# Altium PCB Player.PcbDoc (part 6 of 6)
Units mil, origin at the board's own origin, x right, y up, seen from the top; angles counter-clockwise.
Board outline 2992.13 x 3937.01 mil, 6 copper layers (Top Layer, Mid-Layer 1, Mid-Layer 2, Mid-Layer 3, Mid-Layer 4, Bottom Layer), stack 60.567 mil thick; 284 components, 323 nets, 1590 pads, 1045 vias.
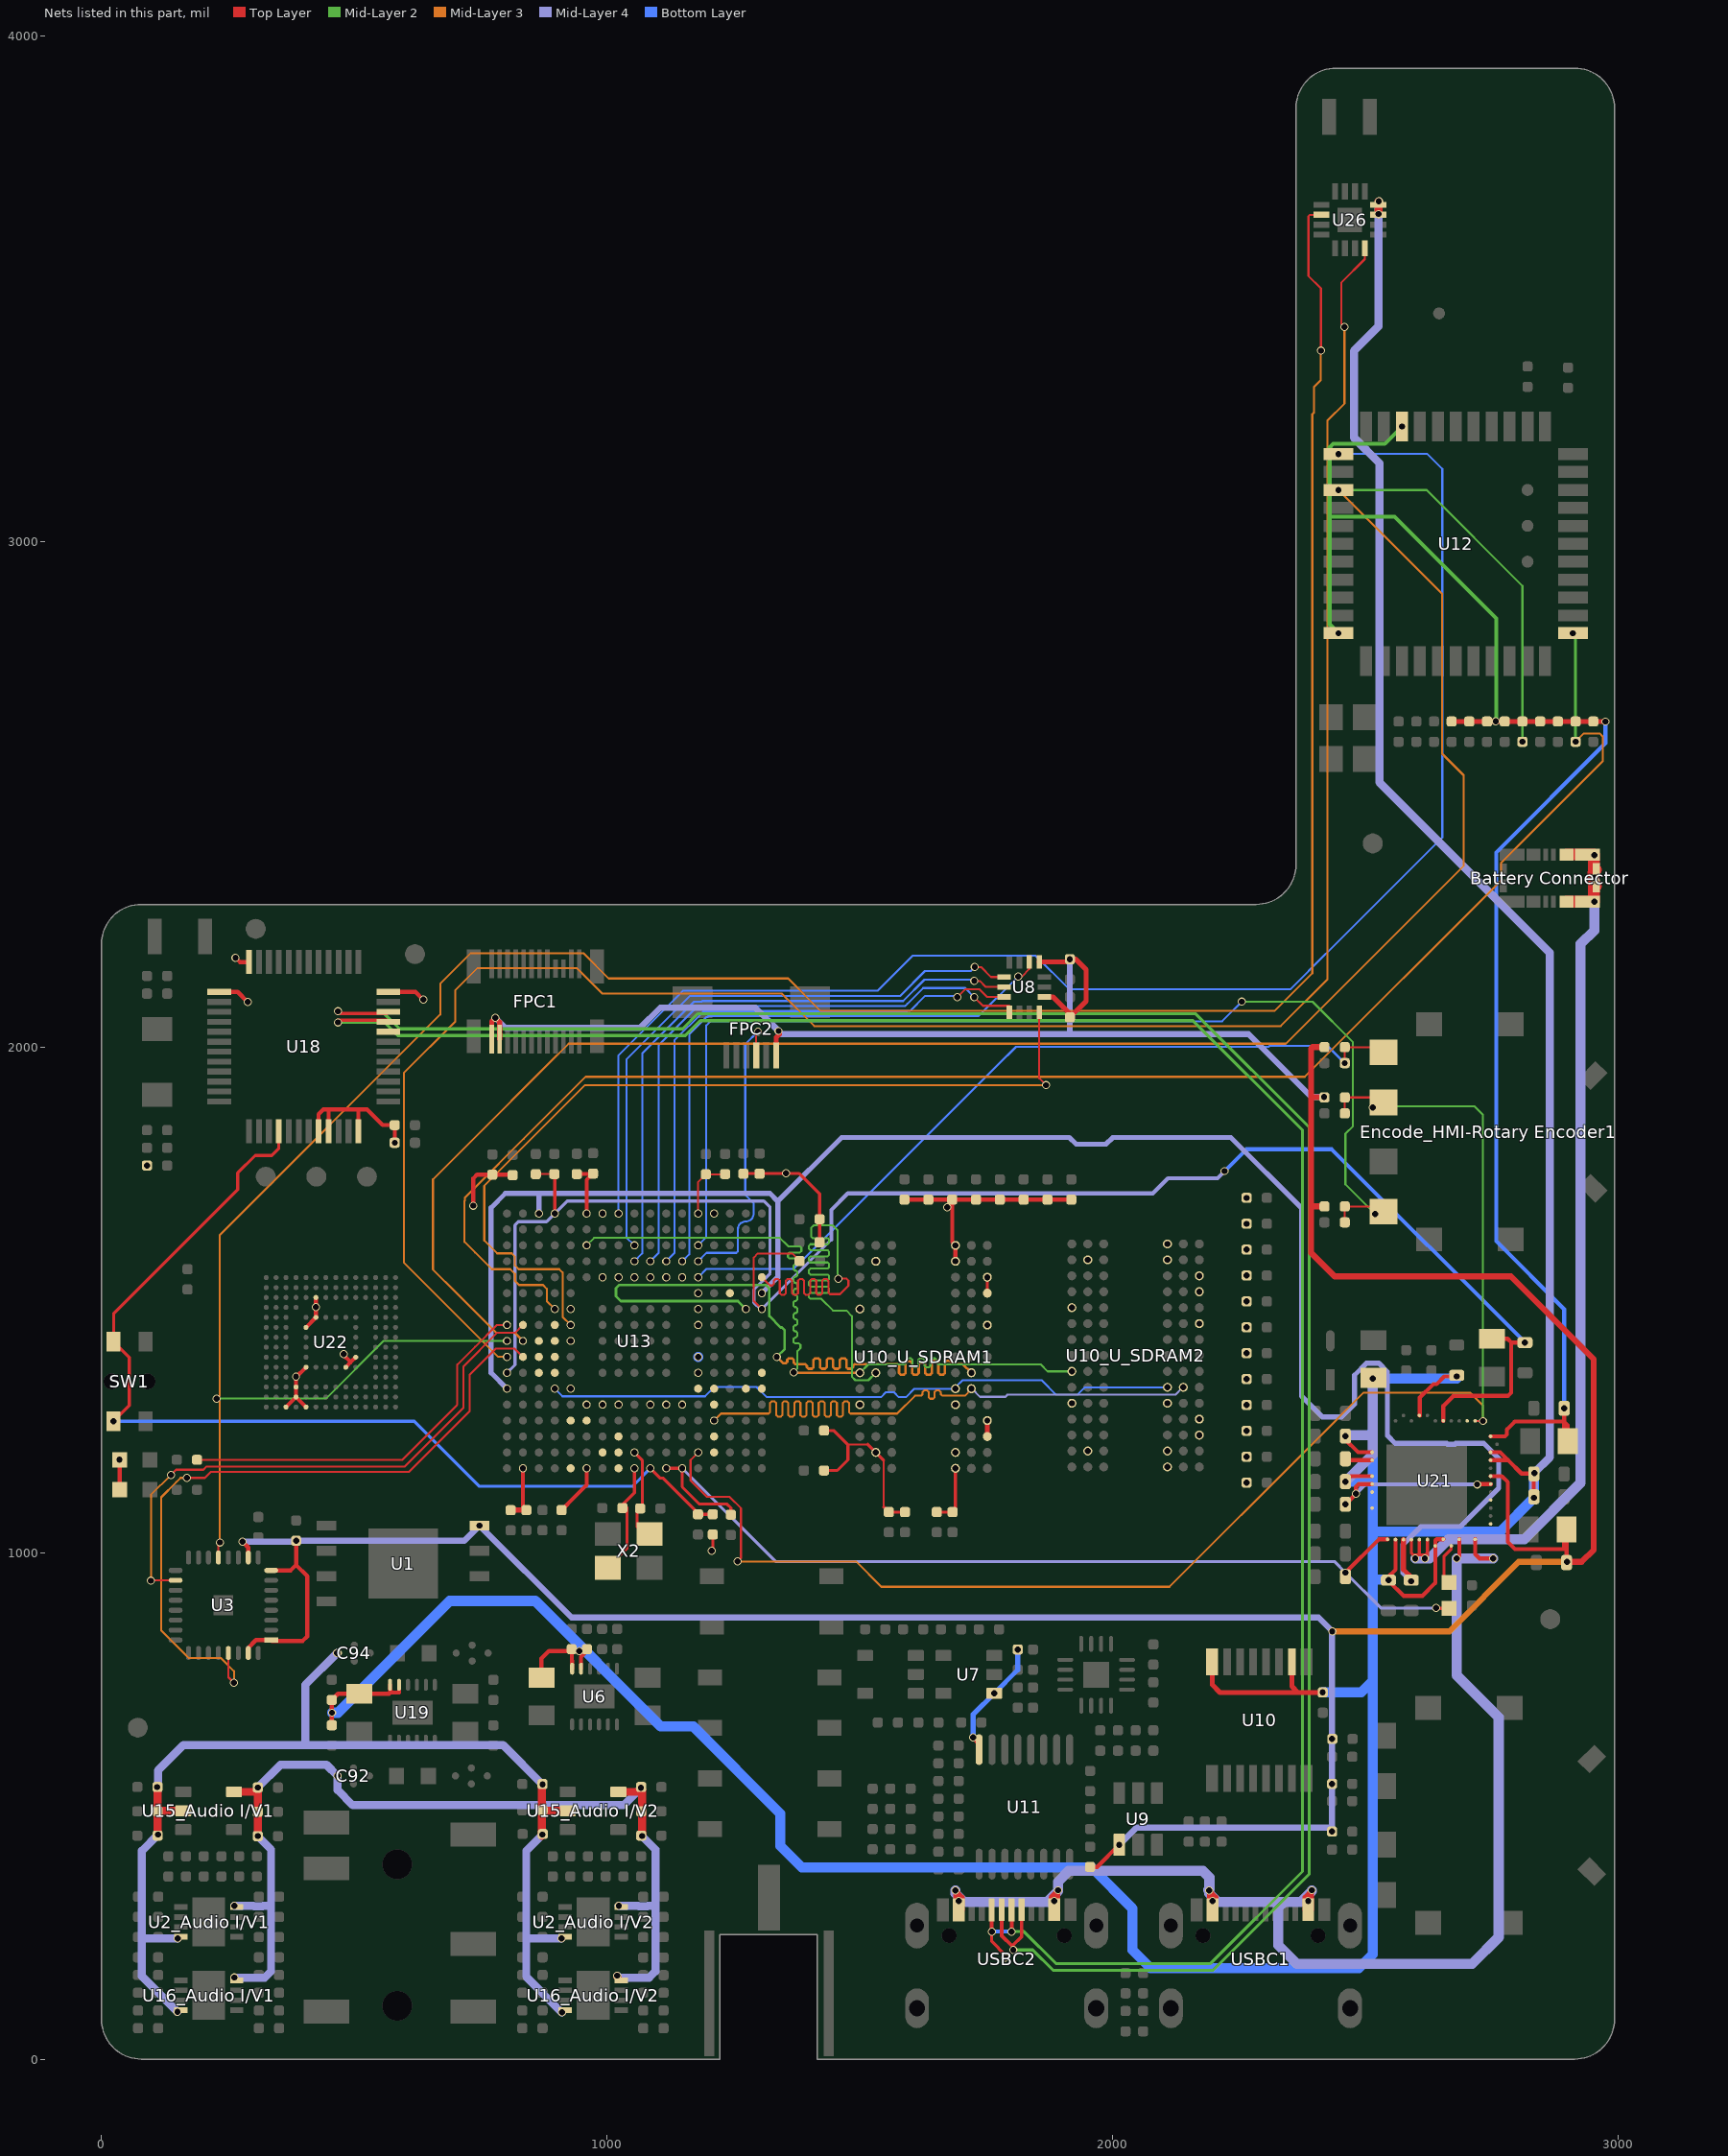
[diagram p10: the nets of this part, all layers, seen from the top]

## Via types
v1: diameter 16, hole 12, Top Layer to Bottom Layer, tented both sides, 1045 vias

## Nets (pads, with @x,y where several pads share a name; then routed paths per layer and width w, separated by ;. In a path a pad name is that pad's centre, name@x,y a point inside that pad or via, vN(x,y) a via of type N, cw(c..) or ccw(c..) an arc to the next point about the centre after c; other vN are vias at no path point) (continued)
PG8: U10_U_SDRAM1.J1 U10_U_SDRAM2.J1 U13.F15 | length 1433.7
  Mid-Layer 2 w4: v1(959.45,1609.13) 974.21,1623.9 1341.73,1623.9 1356.53,1609.09 1358.53,1607.09 1381.04,1607.09 1384.04,1604.09 1384.04,1598.09 1381.04,1595.09 1360.6,1595.09 1357.6,1592.09 1357.6,1586.09 1360.6,1583.09 1373.28,1583.09 1376.28,1580.09 1376.28,1574.09 1373.28,1571.09 1371.21,1571.09 1368.21,1568.09 1368.21,1562.09 1371.21,1559.09 1373.28,1559.09 1376.28,1556.09 1376.28,1550.09 1373.28,1547.09 1371.21,1547.09 1368.21,1544.09 1368.21,1538.09 1371.21,1535.09 1373.28,1535.09 1376.28,1532.09 1376.28,1526.09 1373.28,1523.09 1371.21,1523.09 1368.21,1520.09 1368.21,1514.09 1371.21,1511.09 1373.28,1511.09 1376.28,1508.09 1376.28,1502.09 1373.28,1499.09 1371.21,1499.09 1368.21,1496.09 1368.21,1490.09 1371.21,1487.09 1373.28,1487.09 1376.28,1484.09 1376.28,1478.09 1373.28,1475.09 1371.21,1475.09 1368.21,1472.09 1368.21,1466.09 1371.21,1463.09 1373.28,1463.09 1376.28,1460.09 1376.28,1454.09 1373.28,1451.09 1371.21,1451.09 1368.21,1448.09 1368.21,1442.09 1371.21,1439.09 1373.28,1439.09 1376.28,1436.09 1376.28,1430.09 1373.28,1427.09 1371.56,1427.09 1368.56,1424.09 1368.56,1418.09 1371.56,1415.09 1379.28,1415.09 1382.28,1412.09 1382.28,1406.09 1379.28,1403.09 1376.28,1400.09 1376.28,1371.52 1376.28,1365.53 v1(1368.9,1358.15) ; v1(1499.8,1357.16) 1516.48,1373.84 1586.42,1373.84 1588.42,1373.84 1591.42,1376.84 1591.42,1382.84 1594.42,1385.84 1600.42,1385.84 1603.42,1382.84 1603.42,1371.18 1606.42,1368.18 1612.42,1368.18 1615.42,1371.18 1615.42,1382.84 1618.42,1385.84 1624.42,1385.84 1627.42,1382.84 1627.42,1371.18 1630.42,1368.18 1636.42,1368.18 1639.42,1371.18 1639.42,1382.57 1642.42,1385.57 1648.42,1385.57 1651.42,1382.57 1651.42,1376.84 1654.42,1373.84 1676.97,1373.84 1857.27,1373.84 1871.12,1359.99 v1(1918.98,1359.99)
  Mid-Layer 3 w4: v1(1368.9,1358.15) 1369.89,1357.16 v1(1499.8,1357.16)
PG9: R10.1 U13.A10 | length 769.8
  Top Layer w4: R10.1@189,1185 594.52,1185 702.72,1293.19 703.73,1294.21 703.73,1373.32 738.71,1408.3 782.06,1451.65 v1(801.97,1451.65)
PG10: U3.13 U13.A9 U26.14 | length 5311.2
  Top Layer w4: U3.13@231.24,992.01 231.24,1018.76 v1(234.12,1021.64) ; v1(2411.33,3378.33) 2411.53,3378.53 2411.53,3501.47 2386.92,3526.08 2386.92,3643.92 2390.01,3647.01 U26.14@2412.8,3647.01
  Mid-Layer 2 w4: v1(228,1306) 444,1306 558.16,1420.16 v1(801.97,1420.16)
  Mid-Layer 3 w4: v1(234.12,1021.64) 234.12,1299.88 v1(228,1306) 234.12,1312.12 234.12,1629.91 670,2065.78 670,2126.43 730.57,2187 952.99,2187 1002.99,2137 1357.99,2137 1422.26,2072.72 2319.74,2072.72 2394.38,2147.37 2394.38,3252.47 2397.77,3255.86 2397.77,3306.77 2411.33,3320.33 v1(2411.33,3378.33)
PG11: R22.2 U12.14 U13.B9 | length 4305.9
  Mid-Layer 2 w4: v1(2446.13,3102.58) 2620.64,3102.58 2810,2913.21 v1(2810,2605)
  Mid-Layer 3 w4: v1(833.46,1420.16) 817.41,1436.21 780.68,1436.21 738.71,1478.18 702.72,1514.18 655.54,1561.35 655.54,1705.83 655.54,1739.48 738.71,1822.65 881.89,1965.83 923.89,2007.83 2341.97,2007.83 2694,2359.86 2694,2368.14 2694,2533.02 2693.75,2533.28 2693.75,2538.6 2651,2581.35 2651,2897.71 v1(2446.13,3102.58)
PG12: U13.C9
PG13: U13.D9
PG14: U13.D8
PG15: U10_U_SDRAM1.K7 U10_U_SDRAM2.K7 U13.D6 | length 1275.2
  Bottom Layer w4: v1(896.46,1325.67) 911.45,1310.67 1193.77,1310.67 1212.09,1329 1295.52,1329 1315.59,1308.94 1541.71,1308.94 1551.6,1318.83 1566.82,1318.83 1576.71,1308.94 1590.79,1308.94 1607.53,1325.67 v1(1688.77,1325.67) 1688.77,1328.43 1702.67,1342.32 1859.13,1342.32 1887.68,1313.78 1929.84,1313.78 1944.56,1328.5 v1(2107.95,1328.5)
PGA_OUT1: R50.2 U7.1 U11.8 | length 239.1
  Top Layer w10: v1(1724,636) 1735.43,624.57 U11.8@1735.43,612.09
  Bottom Layer w10: v1(1724,636) 1724,681.8 v1(1765.39,723.19) 1812.01,769.8 v1(1812.01,810)
PH0: C57.1 U13.J2 X2.3 | length 188
  Top Layer w6: v1(1053.94,1199.68) 1069.53,1184.09 1069.53,1093.06 C57.1@1065.29,1088.83 1058.93,1082.47 1058.93,1053.63 1074.27,1038.29 X2.3@1083.63,1038.29
PH1: C54.1 U13.J1 X2.1 | length 243.3
  Top Layer w6: X2.1@1000.95,971.36 1039.29,1009.7 1039.29,1080.83 ; C54.1@1034.28,1095.83 1039.29,1090.82 1039.29,1080.83 ; v1(1053.94,1168.19) 1053.94,1119.67 1030.29,1096.02 C54.1@1030.29,1089.83 1039.29,1080.83
PH2: "C3_HMI-Rotary Encoder1.1" "Encode_HMI-Rotary Encoder1.S" "R15_HMI-Rotary Encoder1.1" U13.N2 U21.25 | length 2945.7
  Top Layer w4: v1(1179.92,1199.68) 1165,1184.76 1165,1144 1197,1112 1242.07,1112 1264.66,1089.41 1264.66,990.66 v1(1258,984) ; 2458.58,1870.08 2458.58,1901.57 2524.97,1901.57 2535.11,1891.43 ; U21.25@2716.5,1262.01 2731.64,1262.01 v1(2731.83,1261.81)
  Mid-Layer 2 w4: v1(2514,1882) 2516,1884 2715,1884 2731.83,1867.17 v1(2731.83,1261.81)
  Mid-Layer 3 w4: v1(1258,984) 1492,984 1542,934 2112,934 2393,1215 2496,1318 2706.22,1318 2731.83,1292.38 v1(2731.83,1261.81)
PH3: U13.P2
PH4: U13.P3
PH5: U10_U_SDRAM1.K8 U10_U_SDRAM2.K8 U13.P4 | length 1365.5
  Mid-Layer 3 w4: v1(1211.42,1262.68) 1225.2,1276.46 1317.32,1276.46 1319.32,1276.46 1322.32,1279.46 1322.32,1297.32 1325.32,1300.32 1331.32,1300.32 1334.32,1297.32 1334.32,1273.46 1337.32,1270.46 1343.32,1270.46 1346.32,1273.46 1346.32,1297.32 1349.32,1300.32 1355.32,1300.32 1358.32,1297.32 1358.32,1273.46 1361.32,1270.46 1367.32,1270.46 1370.32,1273.46 1370.32,1297.32 1373.32,1300.32 1379.32,1300.32 1382.32,1297.32 1382.32,1273.46 1385.32,1270.46 1391.32,1270.46 1394.32,1273.46 1394.32,1297.32 1397.32,1300.32 1403.32,1300.32 1406.32,1297.32 1406.32,1273.46 1409.32,1270.46 1415.32,1270.46 1418.32,1273.46 1418.32,1297.32 1421.32,1300.32 1427.32,1300.32 1430.32,1297.32 1430.32,1273.46 1433.32,1270.46 1439.32,1270.46 1442.32,1273.46 1442.32,1297.32 1445.32,1300.32 1451.32,1300.32 1454.32,1297.32 1454.32,1273.46 1457.32,1270.46 1463.32,1270.46 1466.32,1273.46 1466.32,1297.32 1469.32,1300.32 1475.32,1300.32 1478.32,1297.32 1478.32,1279.46 1481.32,1276.46 1487.8,1276.46 1573.34,1276.46 1608.77,1311.89 1618.71,1311.89 1620.71,1311.89 1623.71,1314.89 1623.71,1319.35 1626.71,1322.35 1632.71,1322.35 1635.71,1319.35 1635.71,1308.89 1638.71,1305.89 1644.71,1305.89 1647.71,1308.89 1647.71,1319.35 1650.71,1322.35 1656.71,1322.35 1659.71,1319.35 1659.71,1314.89 1662.71,1311.89 1705.26,1311.89 1707.48,1311.89 1720.27,1324.68 v1(1720.27,1325.67)
  Mid-Layer 4 w4: v1(1720.27,1325.67) 1721.26,1325.67 1737.29,1309.64 1787.9,1309.64 1791.14,1312.87 ; 1791.14,1313.78 2123.75,1313.78 2138.46,1328.5 v1(2139.45,1328.5)
PH6: U10_U_SDRAM1.J8 U13.T11 | length 1446.3
  Mid-Layer 2 w5: v1(1274.41,1483.15) 1258.66,1498.9 1027.36,1498.9 1017.52,1508.74 1017.52,1524.49 1024.03,1531 1313.23,1531 1320.71,1523.51 1320.71,1469.33 1343.31,1446.73 1345.28,1446.73 1351.18,1440.83 1351.18,1404.41 v1(1335.43,1388.66)
  Mid-Layer 3 w5: v1(1335.43,1388.66) 1345.73,1378.37 1348.23,1375.86 1352.83,1375.86 1356.08,1379.11 1356.08,1382.65 1359.33,1385.9 1365.83,1385.9 1369.08,1382.65 1369.08,1377.15 1372.33,1373.9 1391.83,1373.9 1395.08,1370.65 1395.08,1368.41 1398.33,1365.16 1404.83,1365.16 1408.08,1368.41 1408.08,1382.65 1411.33,1385.9 1417.83,1385.9 1421.08,1382.65 1421.08,1368.41 1424.33,1365.16 1430.83,1365.16 1434.08,1368.41 1434.08,1382.65 1437.33,1385.9 1443.83,1385.9 1447.08,1382.65 1447.08,1368.41 1450.33,1365.16 1456.83,1365.16 1460.08,1368.41 1460.08,1382.65 1463.33,1385.9 1469.83,1385.9 1473.08,1382.65 1473.08,1368.41 1476.33,1365.16 1482.83,1365.16 1486.08,1368.41 1486.08,1370.65 1489.33,1373.9 1573.83,1373.9 1577.08,1370.65 1577.08,1356.61 1580.33,1353.36 1586.83,1353.36 1590.08,1356.61 1590.08,1376.38 1593.33,1379.63 1599.83,1379.63 1603.08,1376.38 1603.08,1356.61 1606.33,1353.36 1612.83,1353.36 1616.08,1356.61 1616.08,1373.58 1619.33,1376.83 1625.83,1376.83 1629.08,1373.58 1629.08,1356.61 1632.33,1353.36 1638.83,1353.36 1642.08,1356.61 1642.08,1378.23 1645.33,1381.48 1651.83,1381.48 1655.08,1378.23 1655.08,1356.61 1658.33,1353.36 1664.83,1353.36 1668.08,1356.61 1668.08,1377.41 1671.33,1380.66 1677.83,1380.66 1681.08,1377.41 1681.08,1377.15 1684.33,1373.9 1690.25,1373.9 1703.53,1373.9 v1(1720.27,1357.16)
PH7: U10_U_SDRAM1.J2 U13.U13 | length 1394.9
  Top Layer w4: U13.U13@1305.91,1546.14 1320.22,1531.83 1322.22,1529.82 1326.46,1529.82 1329.46,1532.82 1329.46,1539.23 1332.46,1542.23 1338.46,1542.23 1341.46,1539.23 1341.46,1514.51 1344.46,1511.51 1350.46,1511.51 1353.46,1514.51 1353.46,1539.23 1356.46,1542.23 1362.46,1542.23 1365.46,1539.23 1365.46,1514.51 1368.46,1511.51 1374.46,1511.51 1377.46,1514.51 1377.46,1539.23 1380.46,1542.23 1386.46,1542.23 1389.46,1539.23 1389.46,1514.51 1392.46,1511.51 1398.46,1511.51 1401.46,1514.51 1401.46,1539.23 1404.46,1542.23 1410.46,1542.23 1413.46,1539.23 1413.46,1514.51 1416.46,1511.51 1422.46,1511.51 1425.46,1514.51 1425.46,1539.23 1428.46,1542.23 1434.46,1542.23 1437.46,1539.23 1437.46,1515.68 1440.46,1512.68 1450.59,1512.68 1460.43,1512.68 1477.17,1529.41 1477.17,1539.25 1473.23,1543.19 v1@1460.43,1543.19
  Mid-Layer 2 w4: v1(1457.48,1543.19) 1456.5,1543.19 1455.51,1544.17 1455.51,1639.38 1446.39,1648.5 1408.27,1648.5 1403.35,1643.58 1403.35,1634.83 1403.35,1626.38 1406.35,1623.38 1435.96,1623.38 1438.96,1620.38 1438.96,1614.38 1435.96,1611.38 1402.04,1611.38 1399.04,1608.38 1399.04,1602.38 1402.04,1599.38 1435.96,1599.38 1438.96,1596.38 1438.96,1590.38 1435.96,1587.38 1402.04,1587.38 1399.04,1584.38 1399.04,1578.38 1402.04,1575.38 1435.96,1575.38 1438.96,1572.38 1438.96,1566.38 1435.96,1563.38 1402.04,1563.38 1399.04,1560.38 1399.04,1554.38 1402.04,1551.38 1435.96,1551.38 1438.96,1548.38 1438.96,1542.38 1435.96,1539.38 1402.04,1539.38 1399.04,1536.38 1399.04,1530.38 1402.04,1527.38 1435.96,1527.38 1438.96,1524.38 1438.96,1518.38 1435.96,1515.38 1402.04,1515.38 1399.04,1512.38 1399.04,1506.38 1402.04,1503.38 1423.47,1503.38 1425.48,1501.38 1446.65,1480.2 1473.23,1480.2 1484.06,1469.37 1484.06,1349.29 1490.95,1342.4 1516.54,1342.4 v1(1531.29,1357.16)
PI8: U13.E4
PI11: U13.F4
PI12: U13.H1
PI13: U13.H2
PI14: U13.H3
PI15: U13.P5
PJ0: U13.N6
PJ1: U13.P6
PJ2: U13.T6
PJ3: U13.U6
PJ4: U13.U7
PJ5: U13.R12
PJ6: "C2_HMI-Rotary Encoder1.1" "Encode_HMI-Rotary Encoder1.B" "R13_HMI-Rotary Encoder1.1" U13.N15 | length 2256
  Top Layer w4: 2458.58,1654.53 2458.58,1686.02 2524.97,1686.02 2535.11,1675.88
  Mid-Layer 2 w4: v1(2255,2091) 2395,2091 2475,2011 2475,1845 2460,1830 2460,1730 v1(2519,1671)
  Bottom Layer w4: v1(1179.92,1609.13) 1196.06,1625.27 1196.06,2044.01 1204.43,2052.38 1601.8,2052.38 2216.38,2052.38 v1(2255,2091)
PJ7: FPC2.3 U13.N14 | length 605.8
  Top Layer w4: FPC2.3@1294.76,1984.27 1294.76,2028.53 v1(1298.23,2032)
  Bottom Layer w4: v1(1179.92,1577.64) 1196.59,1594.31 1255.31,1594.31 1258.66,1597.66 1258.66,1640.97 cw(c1274.16,1640.97) 1274.16,1656.46 ; 1274.16,1656.38 ccw(c1274.16,1672.13) 1289.91,1672.13 1289.91,1692.09 1273.15,1708.85 1273.15,2006.92 v1(1298.23,2032)
PJ8: "C1_HMI-Rotary Encoder1.1" "Encode_HMI-Rotary Encoder1.A" "R12_HMI-Rotary Encoder1.1" U13.N13 | length 1594.6
  Top Layer w4: v1(2458.58,1969.49) 2458.58,2000.98 2524.97,2000.98 2535.11,1990.84
  Bottom Layer w4: v1(1179.92,1546.14) 1196.4,1562.62 1368.4,1562.62 1375.92,1570.14 1376.83,1570.14 1772.52,1965.83 1808.54,2001.84 2299.52,2001.84 2308.45,2001.84 2310.3,2003.69 2424.38,2003.69 v1(2458.58,1969.49)
PJ9: U8.9 U13.M14 | length 1194.6
  Top Layer w4: v1(1813,2141) 1820.25,2141 1834.84,2155.59 U8.9@1834.84,2169.68
  Bottom Layer w4: v1(1148.43,1577.64) 1162.3,1591.51 1162.3,2026.3 1196.79,2060.79 1198.7,2060.79 1200.29,2062.38 1597.66,2062.38 1597.86,2062.58 1603.08,2062.58 1734.59,2062.59 v1(1813,2141)
PJ10: U8.14 U13.L14 | length 1146.1
  Top Layer w4: v1(1692.27,2099.93) 1708.26,2115.91 1735.7,2115.91 1751.3,2100.31 U8.14@1785.14,2100.31
  Bottom Layer w4: v1(1116.93,1577.64) 1133,1593.71 1133,2014.22 1189.57,2070.79 1194.56,2070.79 1196.15,2072.38 1593.51,2072.38 1593.71,2072.58 1598.93,2072.58 1628.86,2102.5 1689.69,2102.5 v1(1692.27,2099.93)
PJ11: U8.1 U13.K14 | length 1201.6
  Top Layer w4: v1(1725.99,2100.05) 1743.22,2082.82 1795.47,2082.82 U8.1@1795.47,2070.31
  Bottom Layer w4: v1(1085.43,1577.64) 1102,1594.2 1102,1965.83 1102,2005 1177.79,2080.79 1190.42,2080.79 1192,2082.38 1589.37,2082.38 1593.64,2086.65 1624.98,2117.99 1708.06,2117.99 v1(1725.99,2100.05)
PJ12: R46.2 U12.34 U13.D11 | length 3300.8
  Mid-Layer 2 w6: v1(2909.87,2819.58) 2915,2814.45 v1(2915,2605)
  Mid-Layer 3 w4: v1(896.46,1483.15) 880.68,1498.93 880.68,1523.36 873.23,1530.81 825.8,1530.81 817.7,1538.91 817.7,1552.53 808.27,1561.96 772.04,1561.96 738.71,1595.29 718,1616 718,1697.49 718.05,1697.54 718.29,1697.3 718.53,1697.54 718.53,1703.53 738.71,1723.71 835,1820 957.35,1942.35 2379.35,1942.35 2768,2331 2768,2366 2969,2567 2969,2614.98 2962.52,2621.45 2931.45,2621.45 v1(2915,2605)
PJ13: U8.4 U13.E10 | length 1753.2
  Top Layer w4: U8.4@1854.53,2070.31 1854.53,1939.47 v1(1868,1926)
  Mid-Layer 3 w4: v1(927.95,1451.65) 912,1467.61 912,1555.29 905.21,1562.07 824.91,1562.07 817.56,1569.42 817.56,1586.98 811.16,1593.39 782.61,1593.39 757,1619 757,1726.89 956.11,1926 v1(1868,1926)
PJ14: U13.D10
PJ15: U3.18 U13.B10 | length 1141.4
  Top Layer w4: v1(98,946) 98.73,946.73 U3.18@146.59,946.73 ; v1(137.4,1155.3) 147.6,1165.5 201.5,1165.5 208,1172 600,1172 715.72,1287.72 715.72,1369.72 782,1436 817.81,1436 U13.B10@833.46,1451.65
  Mid-Layer 3 w4: v1(98,946) 98,1115.9 v1(137.4,1155.3)
PK0: U8.13 U13.J14 | length 1199.5
  Top Layer w4: v1(1725.96,2131.96) 1736.86,2131.96 1748.82,2119.99 U8.13@1785.14,2119.99
  Bottom Layer w4: v1(1053.94,1577.64) 1069.4,1593.1 1069.4,1965.83 1069.4,1988.4 1171.79,2090.79 1186.27,2090.79 1187.86,2092.38 1585.23,2092.38 1627.38,2134.53 1723.39,2134.53 v1(1725.96,2131.96)
PK1: U8.12 U13.J15 | length 1205
  Top Layer w4: v1(1726.95,2159.4) 1739.48,2159.4 1759.19,2139.68 U8.12@1785.14,2139.68
  Bottom Layer w4: v1(1053.94,1609.13) 1038.16,1624.92 1038.16,1965.83 1038.16,1976.79 1163.36,2102 1183.34,2102 1183.72,2102.38 1579.38,2102.38 1628.54,2151.54 1719.09,2151.54 v1(1726.95,2159.4)
PK2: U12.12 U13.H17 | length 3121.8
  Bottom Layer w4: v1(1022.44,1672.13) 1022.44,1984.81 1150.64,2113 1535.54,2113 1604.54,2182 1847,2182 1913.16,2115.84 2351.49,2115.84 2421.62,2185.98 2421.87,2185.98 2651.64,2415.74 2651.64,3144.36 2622,3174 2446.55,3174 v1(2446.13,3173.58)
PK3: U13.C8
PK4: U3.29 U13.B8 | length 1413.3
  Top Layer w4: v1(169.06,1149.31) 204.54,1149.31 216.69,1161.46 608.46,1161.46 728,1281 728,1353 780,1405 817.13,1405 U13.B8@833.46,1388.66 ; U3.29@250.93,803.01 250.93,755.07 v1(262,744)
  Mid-Layer 3 w4: v1(169.06,1149.31) 156.28,1149.31 147.8,1140.83 118,1111.03 118,848 173,793 236,793 262,767 v1(262,744)
PK5: U13.A8 U26.4 | length 4171.8
  Top Layer w4: v1(2458,3425) 2452.11,3430.89 2452.11,3513.11 2498.43,3559.43 U26.4@2498.43,3581.06
  Mid-Layer 3 w4: v1(801.97,1388.66) 784.34,1388.66 738.71,1434.29 702.72,1470.28 598,1575 598,1705.83 598,1950 700,2052 700,2114 743,2157 940.56,2157 990.56,2107 1345.56,2107 1409.84,2042.72 2332.16,2042.72 2424.38,2134.94 2424.38,3240.04 2458,3273.66 v1(2458,3425)
PK6: U13.C7
PK7: U13.D7
PMU_EN: R3.1 U21.9 | length 82.4
  Top Layer w6: R3.1@2665,942.6 2655,952.6 2655,995 2669.25,1009.25 U21.9@2669.25,1014.96
PMU_LDOPGOOD: U21.46
PMU_PGOOD: U21.26
PMU_R\S\T\: U21.44
R\E\S\E\T\: C65.1 R6.1 SW1.1 SW1.4 U13.K1 U18.16 | length 2073.6
  Top Layer w6: v1(23.94,1261.26) 55,1292.32 55,1387.68 SW1.4@23.94,1418.74 23.94,1473.94 269.5,1719.5 269.5,1752.5 304,1787 337,1787 350.79,1800.79 U18.16@350.79,1834.69 ; v1(1085.43,1168.19) 1104.98,1148.64 1110.85,1148.64 1182.14,1077.35 R6.1@1208.8,1077.35 R6.1@1200.87,1077.35 ; C65.1@1179.67,1077.29 R6.1@1200.87,1077.29
  Bottom Layer w6: v1(23.94,1261.26) 137.72,1261.26 618.53,1261.26 702.72,1177.08 738.71,1141.09 747.34,1132.45 1049.7,1132.45 v1(1085.43,1168.19)
TDO/SWO: U18.32
USB-DBG_N: U18.33 USBC2.A7 USBC2.B7 | length 4456.9
  Top Layer w6: v1(1760.47,252.13) 1760.47,232.59 1787.52,205.55 v1(1787.52,200.32)
  Top Layer w7.28: v1(467.51,2050) 467.51,2053.66 468.22,2054.36 474.82,2054.36 474.88,2054.42 564.12,2054.42 U18.33@567.32,2051.22 ; v1(1760.47,252.13) USBC2.B7@1760.47,295.44 ; v1(1799.84,252.13) USBC2.A7@1799.84,295.38
  Mid-Layer 2 w6: v1(467.51,2050) 559.98,2050 585.98,2024 1154.79,2024 1184.22,2053.43 2158.57,2053.43 2375,1837 2375,371 2193,189 1887.32,189 1824.19,252.13 v1(1799.84,252.13)
  Bottom Layer w7.28: v1(1760.47,252.13) v1(1799.84,252.13)
USB-DBG_P: U18.34 USBC2.A6 USBC2.B6 | length 4474.1
  Top Layer w7.28: v1(467.51,2072) 467.51,2067.65 469.32,2067.65 469.38,2067.7 564.12,2067.7 U18.34@567.32,2070.91 ; USBC2.A6@1780.16,295.44 1780.16,244.02 v1@1800.75,223.43 ; v1(1803.07,215.87) 1802.61,216.34 1802.61,225.28 1819.53,242.21 USBC2.B6@1819.53,295.44
  Mid-Layer 2 w6: v1(467.51,2072) 467.51,2067 559.95,2067 589.67,2037.28 1149.28,2037.28 1179.49,2067.49 2163.3,2067.49 2388.28,1842.5 2388.28,365.5 2198.5,175.72 1881.82,175.72 1841.66,215.87 v1(1803.07,215.87)
VBATT: "Battery Connector.1" "Battery Connector.2" "Battery Connector.9" "Battery Connector.10" "Battery Connector.13" "Battery Connector.14" U21.4 U21.5 U21.6 | length 2000.6
  Top Layer w6: U21.4@2590.51,1027.34 2590.51,1000.49 2594,997 ; v1(2598,990) 2598,993 2594,997 ; 2606,998 2606,1027.08 U21.5@2606.26,1027.34 ; v1(2617,990) 2622,995 2622,1001 ; U21.6@2622,1028 2622,1001 ; 2594,997 2618,997 2622,1001
  Top Layer w23: 2896.87,2288.7 2938.12,2288.7 ; 2896.87,2382.01 v1@2950.92,2382.01 ; 2938.12,2382.01 v1@2950.92,2382.01 ; v1@2945.6,2288.7 2950.92,2288.7 2951.23,2289.01 2951.23,2318.52 2952.53,2319.82 2955.84,2319.82 2950.21,2325.45 2950.21,2346.37 2955.84,2352.01 2952.53,2352.01 2951.23,2353.3 2951.23,2381.7 v1@2950.92,2382.01
  Mid-Layer 4 w20: v1(2598,990) 2626,990 2664,1028 2813.58,1028 2925,1139.42 2925,2205 2952,2232 v1(2952,2289) v1(2952,2336) v1(2952,2381)
VBUS: U21.10 U21.12 USBC1.A4 USBC1.A9 USBC1.B4 USBC1.B9 USBC2.A4 USBC2.A9 USBC2.B4 USBC2.B9 | length 2667.1
  Top Layer w8: v1(2680,990) 2685,995 U21.10@2685,1027.76 ; U21.12@2716.5,1027.76 2716.5,998.5 2725,990 2752.05,990 v1(2752.2,989.84)
  Top Layer w11: USBC2.A4@1689.61,295.28 1689.61,332.74 v1(1688.6,333.74) 1688.6,332.45 1701.42,319.63 USBC2.B9@1701.42,295.28 ; USBC2.B4@1878.59,295.51 1878.59,319.79 1891.41,332.61 v1(1891.41,333.9) 1890.4,332.9 USBC2.A9@1890.4,295.51 ; USBC1.A4@2191.53,295.28 2191.54,332.74 v1(2190.53,333.74) 2190.53,332.45 2203.35,319.63 USBC1.B9@2203.34,295.28 ; USBC1.B4@2380.51,295.51 2380.51,319.79 2393.33,332.61 v1(2393.33,333.9) 2392.33,332.9 USBC1.A9@2392.33,295.51
  Mid-Layer 4 w20: v1(1688.6,333.74) 1688.6,327.64 1705.23,311.02 1870.29,311.02 1891.41,332.13 v1(1891.41,333.9) 1891.41,350.58 1912.82,372 2178,372 2191,359 2191,336 v1@2189,334 ; v1(2190.53,333.74) 2190.53,327.64 2207.15,311.02 2339,311.02 ; v1(2393.33,333.9) 2393.33,332.13 2372.22,311.02 2339,311.02 ; v1@2752.05,990 v1(2680,990) 2680,759 2763,676 2763,241 2710,188 2364,188 2327,225 2327,299.02 2339,311.02
  other v1: 1695.37,312.49 1884.35,312.65 2197.3,312.49 2386.27,312.65
VCAP: C6.1 C12.2 C13.2 C14.2 L3.2 U13.A7 U13.D17 U13.U11 U21.29 | length 3578.9
  Top Layer w4: C14.2@859,1750 895.44,1750 C12.2@895.51,1750.08 ; v1(1305.91,1483.15) 1290,1499.05 1290,1585 1298.14,1593.14 1365.85,1593.14 C13.2@1380.76,1578.23
  Top Layer w6: C12.2@895.51,1750.08 896.46,1749.13 v1(896.46,1672.13)
  Top Layer w8: U21.29@2653.5,1262.42 2653.5,1291.52 2673.38,1311.4 2781.4,1311.4 2787.89,1317.89 2787.89,1417.01 ; L3.2@2750,1424.41 2780.49,1424.41 2787.89,1417.01 ; L3.2@2750.07,1424.35 2780.56,1424.35 ; v1(2815,1417.01) 2787.89,1417.01
  Mid-Layer 4 w6: v1(801.97,1357.17) 817.63,1372.82 817.63,1649.08 824.38,1655.84 880.17,1655.84 v1(896.46,1672.13) 921.06,1696.73 1309.84,1696.73 1322.25,1684.33 1322.25,1553.7 1290.16,1521.61 1290.16,1495.94 1302.95,1483.15 v1(1305.91,1483.15) 1443.38,1620.62
  Mid-Layer 4 w8: 1443.38,1620.62 1443.38,1679.38 1476,1712 2079,1712 2108.94,1741.94 2206.94,1741.94 v1(2221,1756)
  Bottom Layer w8: v1(2221,1756) 2230.71,1765.71 2264,1799 2433.01,1799 v1(2815,1417.01)
"VCC_Audio I/V1": "C40_Audio I/V1.1" "C40_Audio I/V2.1" "C53_Audio I/V1.1" "C53_Audio I/V2.1" "C72_Audio I/V1.1" "C72_Audio I/V2.1" "U2_Audio I/V1.8" "U2_Audio I/V2.8" "U15_Audio I/V1.5" "U15_Audio I/V2.5" "U16_Audio I/V1.8" "U16_Audio I/V2.8" C92.3 | length 1999
  Top Layer w10: v1(263.08,161.44) 267.69,156.83 v1@267.69,155.71 ; v1@1020,163.4 1027.69,155.71
  Top Layer w16: 262.2,528.4 303.4,528.4 v1@308,533 ; v1@308,443 309,444 309,489 v1@309,533 ; v1@1020,163.4 v1(1020,165) ; 1022.2,528.4 1063.4,528.4 v1@1068,533 ; v1@1068,443 1069,444 v1@1069,533
  Mid-Layer 4 w16: v1(263,303) 300.95,303 302.16,301.79 318.73,301.79 319.94,303 334,303 335,302 ; v1@264,161 323,161 335.4,173.4 335.4,414.6 v1(309,441) ; v1(309,537) 354,582 445.01,582 v1(467.01,560) 467.01,531.99 497,502 1032.5,502 v1(1066.78,536.28) ; v1(1020,165) 1024,161 1083,161 1095.4,173.4 1095.4,414.6 v1(1069,441) ; v1(1023,303) 1061.66,303 1062.68,301.98 1079.25,301.98 1080.26,303 1094,303 1095,302
VDCDC1: "R12_HMI-Rotary Encoder1.2" "R12_HMI-Rotary Encoder2.2" "R13_HMI-Rotary Encoder1.2" "R13_HMI-Rotary Encoder2.2" "R15_HMI-Rotary Encoder1.2" "R15_HMI-Rotary Encoder2.2" C4.1 C31.1 C56.2 C58.2 FPC1.1 FPC1.2 FPC2.1 L1.2 R1.1 U1.8 U3.1 U3.8 U3.10 U3.31 U8.5 U8.8 U9.4 U21.19 | length 8373.1
  Top Layer w8: v1(279.1,1022.93) 290.31,1011.72 U3.10@290.31,992.01 ; U3.31@290.31,803.01 290.31,813.31 305.59,828.59 U3.1@335.59,828.59 337.17,827 398,827 407,836 407,955 385,977 ; U3.8@335.59,966.42 374.42,966.42 385,977 ; v1(385,1025) 385,977 ; C31.1@1955,380 1968.78,380 v1(2012.6,423.82) ; U21.19@2747.01,1152.76 2769.2,1152.76 2781,1140.96 2781,1023 2795.44,1008.56 2891.9,1008.56 2891.9,1041.71 L1.2@2897.2,1047.01 2897.2,982.21 C4.1@2897.4,982.01
  Top Layer w10: FPC1.1@771.77,2017.01 771.77,2051.77 v1(779,2059) 787.52,2050.48 FPC1.2@787.52,2017.01 ; FPC2.1@1334.13,1984.27 1334.13,2020.13 1341,2027 1341,2031.09 1339.09,2033 v1(1339,2033) ; U8.8@1854.53,2169.68 1909.69,2169.68 v1(1915,2175) 1926.22,2175 1947,2154.22 1947,2092 C56.2@1915,2060 1915,2067.08 1881.77,2100.31 U8.5@1864.86,2100.31
  Top Layer w12: 2392,1688 2393.98,1686.02 2418.58,1686.02 ; v1(2417.57,1902.46) 2417.11,1902 2392,1902 ; 2418.58,2000.98 2394.98,2000.98 2392,1998 2392,1902 ; v1(2898.38,983.03) 2927.03,983.03 2951,1007 2951,1384 2787.5,1547.5 2438.5,1547.5 2392,1594 2392,1902
  Mid-Layer 3 w12: v1(2434,846) 2665.61,846 2802.64,983.03 v1(2898.38,983.03)
  Mid-Layer 4 w12: v1(279.1,1022.93) 382.93,1022.93 v1(385,1025) 717.76,1025 v1(747.76,1055) 929.76,873 2407,873 v1(2434,846) v1@2433.64,845.64 ; v1(779,2059) 799,2039 1065,2039 1105,2079 1293.09,2079 1339,2033.09 v1(1339,2033) 1339,2029 1341,2027 1915,2027 ; v1(1915,2175) 1915,2027 ; v1(2012.6,423.82) 2046.78,458 2425.64,458 v1(2433.64,450) v1(2433.64,544.25) v1(2433.66,633.23) ; v1(2417.57,1902.46) 2392.54,1902.46 2268,2027 1915,2027 ; v1(2433.66,633.23) v1@2433.66,845.62
VDCDC2: C5.1 L2.2 R18.1 R21.1 R22.1 R23.1 R33.1 R35.1 R46.1 R47.1 R54.1 U12.9 U12.22 U21.24 | length 3232.6
  Top Layer w8: U21.24@2747.01,1231.5 2775.5,1231.5 2779,1235 2779,1245 2795,1261 2891.82,1261 2899.8,1253.01 L2.2@2899.8,1222.01 2892.4,1229.41 v1(2892.4,1287.01)
  Top Layer w10: R21.1@2670,2645 R33.1@2740,2645 v1@2757,2645 ; v1(2757.26,2645.48) 2757,2645.23 v1@2757,2645 ; v1@2973.8,2645 R54.1@2950,2645 v1@2757,2645
  Mid-Layer 2 w8: v1(2446.13,2819.58) 2428.61,2837.1 2428.61,3050 ; v1(2572,3228.45) 2537.9,3194.35 2436,3194.35 2428.61,3186.96 2428.61,3050 ; v1(2757.26,2645.48) 2758.02,2646.25 2758.02,2848.98 2557,3050 2428.61,3050
  Bottom Layer w8: v1(2892.4,1287.01) 2892.4,1482.97 2758.02,1617.35 2758.02,2386.02 2974,2602 2974,2644.8 v1(2973.84,2644.97)
VDDCAPDSI: C10.2 C11.2 U13.N17 | length 122.2
  Top Layer w4: v1(1179.92,1672.13) 1179.92,1734.5 C10.2@1195,1749.58 1232.75,1749.58 C11.2@1233.25,1750.08
"VEE_Audio I/V1": "C73_Audio I/V1.2" "C73_Audio I/V2.2" "C83_Audio I/V1.2" "C83_Audio I/V2.2" "C84_Audio I/V1.2" "C84_Audio I/V2.2" "U2_Audio I/V1.4" "U2_Audio I/V2.4" "U15_Audio I/V1.2" "U15_Audio I/V2.2" "U16_Audio I/V1.4" "U16_Audio I/V2.4" C94.3 | length 2282.8
  Top Layer w16: 108,491 161.8,491 ; v1@111,442 111,490 v1@111,540 ; 868,491 921.8,491 ; v1@871,442 v1@871,540
  Mid-Layer 4 w16: 82,239 150.15,239 v1(150.64,238.5) ; v1(110,538) 112,540 112,571 162,621 403,621 ; v1(112,444) 80,412 80,239 80,163.69 v1(150.31,93.39) ; v1(466,803) 403,740 403,621 ; 842,239 909.58,239 v1(909.73,238.85) ; v1(872,444) 840,412 840,239 840,162.64 910.22,92.42 v1(910.76,92.42) ; v1(872.19,542.99) 794.18,621 403,621
VFBSMPS: U13.G2
VLDO1_1.8V: C16.2 U13.A6 U13.C17 U13.U12 U21.3 | length 3815.7
  Top Layer w10: U21.3@2574.76,1027.34 2574.76,968.24 C16.2@2592,951
  Mid-Layer 4 w10: v1(801.97,1325.67) 770.47,1357.17 770.47,1683.48 798.84,1711.84 868.9,1711.84 ; v1(864.96,1672.13) 864.96,1707.91 868.9,1711.84 ; v1(1305.91,1514.65) 1337.4,1546.14 1337.4,1696.1 ; v1(2590,945) 2574,961 2574,1018 2609,1053 2687,1053 2763,1129 2763,1188 2733.37,1217.63 2678.09,1217.63 2676.28,1215.82 2662.2,1215.82 2660.4,1217.63 2558.37,1217.63 2543,1233 2543,1359 2525.77,1376.23 2501.88,1376.23 2478,1352.35 2478,1295.08 2452.95,1270.03 2413.97,1270.03 2373,1311 2373,1682.71 2233.09,1822.62 2000,1822.62 1986.38,1809 1927.62,1809 1914,1822.62 1463.92,1822.62 1337.4,1696.1 ; 868.9,1711.84 1321.65,1711.84 1337.4,1696.1
VLDO2_3.3V: C17.2 C26.2 R3.2 U13.L1 U13.M1 U21.1 | length 1936.7
  Top Layer w6: v1(1116.93,1168.19) v1(1148.43,1168.19) 1148.43,1131.59 1182.62,1097.4 1237.28,1097.4 1244.55,1090.13 C26.2@1244.55,1076.58 ; v1(2639,892) 2639.58,891.42 R3.2@2665,891.42
  Top Layer w8: v1(2460,962.01) 2525.75,1027.76 U21.1@2543.27,1027.76
  Mid-Layer 4 w6: v1(1148.43,1168.19) 1332.61,984 2438.01,984 v1(2460,962.01) 2530.01,892 v1(2639,892)
VLDO3_1.8V: C18.2 U21.40 | length 53.9
  Top Layer w8: C18.2@2460,1187.01 2462.76,1184.25 U21.40@2512.76,1184.25
VLDO4_3.3V: C16_U_SDRAM1.1 C16_U_SDRAM2.1 C17_U_SDRAM1.1 C17_U_SDRAM2.1 C18_U_SDRAM1.1 C18_U_SDRAM2.1 C19_U_SDRAM1.1 C19_U_SDRAM2.1 C20_U_SDRAM1.1 C20_U_SDRAM2.1 C21.2 C21_U_SDRAM1.1 C21_U_SDRAM2.1 C22.2 C22_U_SDRAM1.1 C22_U_SDRAM2.1 C23.2 C23_U_SDRAM1.1 C23_U_SDRAM2.1 C24_U_SDRAM1.1 C24_U_SDRAM2.1 C25_U_SDRAM1.1 C25_U_SDRAM2.1 C26_U_SDRAM1.1 C26_U_SDRAM2.1 C27_U_SDRAM1.1 C27_U_SDRAM2.1 C41.1 C42.1 C43.1 C44.1 C45.1 C46.1 C47.1 C48.1 C49.1 C50.1 C51.1 C52.1 LED1.1 LED2.1 R5.2 R6.2 R8.1 U10_U_SDRAM1.A7 U10_U_SDRAM1.B2 U10_U_SDRAM1.B7 U10_U_SDRAM1.C9 U10_U_SDRAM1.D9 U10_U_SDRAM1.E1 U10_U_SDRAM1.F9 U10_U_SDRAM1.L1 U10_U_SDRAM1.L7 U10_U_SDRAM1.M9 U10_U_SDRAM1.N9 U10_U_SDRAM1.P2 U10_U_SDRAM1.P7 U10_U_SDRAM1.R7 U10_U_SDRAM2.A7 U10_U_SDRAM2.B2 U10_U_SDRAM2.B7 U10_U_SDRAM2.C9 U10_U_SDRAM2.D9 U10_U_SDRAM2.E1 U10_U_SDRAM2.F9 U10_U_SDRAM2.L1 U10_U_SDRAM2.L7 U10_U_SDRAM2.M9 U10_U_SDRAM2.N9 U10_U_SDRAM2.P2 U10_U_SDRAM2.P7 U10_U_SDRAM2.R7 U13.B1 U13.E6 U13.E9 U13.E11 U13.F1 U13.F5 U13.F17 U13.G5 U13.G13 U13.G17 U13.H5 U13.H13 U13.J13 U13.K5 U13.K13 U13.L5 U13.L13 U13.M5 U13.M13 U13.N7 U13.N8 U13.N10 U13.N11 U13.N12 U13.P17 U18.1 U18.20 U18.21 U18.24 U18.36 U18.48 U21.18 U21.43 U22.C6 U22.E6 U22.F5 U22.J10 U22.K5 U22.K9 U22.M4 U22.N4 U22.P3 U22.P5 | length 2918.3
  Top Layer w4: 1475.37,1215.63 1515.35,1215.63 ; 1546.71,1092.07 1546.71,1184.26
  Top Layer w6: v1(1207,1005) 1208.8,1006.8 R6.2@1208.8,1037.35 ; C41.1@1269.45,1750.83 1269.62,1751 1380,1751 1420.12,1710.88 C27_U_SDRAM1.1@1420.12,1660.89 1420.12,1615.38 C19_U_SDRAM1.1@1419.82,1615.08 ; C23_U_SDRAM1.1@1429,1164 1455,1164 1476,1185 1476,1215 1448,1243 C21_U_SDRAM1.1@1429,1243 ; 1515.35,1215.63 v1(1531.29,1199.68) 1546.71,1184.26 ; 1546.71,1092.07 C50.1@1557,1081.78 C49.1@1589,1081.78 ; C52.1@1652,1081.78 C51.1@1683,1081.78 1688.77,1087.56 v1(1688.77,1168.19) ; U10_U_SDRAM1.D9@1751.76,1514.64 v1(1751.76,1546.14)
  Top Layer w8: v1(35.66,1185.35) LED1.1@36,1185 LED2.1@36,1126 ; U18.1@232.68,2110.28 269.37,2110.28 v1(289.46,2090.18) ; v1(265,2178) 273.67,2169.33 U18.48@291.73,2169.33 ; U22.P3@365,1289.53 U22.N4@384.69,1309.22 ; U22.P5@404.37,1289.53 U22.N4@384.69,1309.22 ; U22.K5@404.37,1368.27 384.69,1348.59 U22.N4@384.69,1309.22 ; U22.F5@404.37,1447.01 U22.E6@424.06,1466.7 U22.C6@424.06,1506.07 ; U18.20@429.53,1834.68 429.53,1868.53 439,1878 450,1878 ; U18.21@449.21,1834.68 449.21,1877.21 450,1878 ; v1(479,1394) 479,1392.07 492.96,1378.11 ; U22.K9@483.11,1368.27 492.96,1378.11 ; U22.J10@502.8,1387.96 492.96,1378.11 ; U18.24@508.27,1834.69 508.27,1875.73 506,1878 ; U18.36@567.32,2110.28 621.12,2110.28 v1(636.4,2095) ; v1(580,1812.01) C21.2@580,1847.01 555.99,1847.01 525,1878 506,1878 ; v1(735.36,1687.6) 735.36,1741.69 742.67,1749 C45.1@773,1749 812.12,1749 C43.1@813.1,1748.03 ; v1(833.46,1168.19) 833.46,1092.35 C47.1@840.22,1085.6 ; R5.2@909.85,1085.65 936.05,1111.85 959.45,1135.25 v1(959.45,1168.19) ; C44.1@940,1750.22 C42.1@972,1750.22 ; v1(959.45,1672.13) 959.45,1738.66 C42.1@972,1751.22 ; C22_U_SDRAM1.1@1588,1699.59 C25_U_SDRAM1.1@1635.14,1699.59 C20_U_SDRAM1.1@1682.27,1699.59 ; v1(1688.77,1577.64) v1(1688.77,1609.13) 1682.27,1615.63 C20_U_SDRAM1.1@1682.27,1699.59 ; C21_U_SDRAM2.1@1917.96,1699.59 C18_U_SDRAM2.1@1870.82,1699.59 C22_U_SDRAM2.1@1823.69,1699.59 C23_U_SDRAM2.1@1776.55,1699.59 C16_U_SDRAM1.1@1729.41,1699.59 C20_U_SDRAM1.1@1682.27,1699.59 ; v1(2460,1097.01) 2480.72,1117.72 v1(2480.72,1118.23) 2480.72,1131.72 2486.01,1137.01 U21.43@2512.76,1137.01 ; v1(2720.45,1136.4) 2721.06,1137.01 U21.18@2747.42,1137.01 ; 450,1878 506,1878
  Top Layer w10: C48.1@809.22,1085.6 C47.1@840.22,1085.6 ; U10_U_SDRAM1.N9@1751.76,1231.18 v1(1751.76,1262.68)
  Mid-Layer 4 w8: v1(2480.72,1118.23) 2498.88,1136.4 v1(2720.45,1136.4)
  Bottom Layer w20: v1@1179.76,1388.83 v1(1179.92,1388.66)
  other v1: 2264.59,1139.96 2107.95,1171.02 2264.59,1191.15 1688.77,1199.68 1950.47,1202.51 2107.95,1202.51 2170.94,1234.01 2264.59,1242.33 2170.94,1265.51 959.45,1294.17 990.95,1294.17 1022.44,1294.17 1085.43,1294.17 1116.93,1294.17 1148.43,1294.17 1499.8,1294.17 1688.77,1294.17 2264.59,1293.52 1918.98,1297 2107.95,1297 927.95,1325.67 2264.59,1344.7 384.69,1349.55 1179.92,1357.17 2264.59,1395.89 927.95,1420.16 2264.59,1447.07 1179.92,1451.65 1751.76,1451.65 2170.94,1454.48 927.95,1483.15 1179.92,1483.15 1499.8,1483.15 1918.98,1485.98 424.06,1487.35 2264.59,1498.26 1179.92,1514.65 2170.94,1517.47 990.95,1546.14 1022.44,1546.14 1053.94,1546.14 1085.43,1546.14 1116.93,1546.14 1148.43,1546.14 2170.94,1548.97 2264.59,1549.44 1531.29,1577.64 1950.47,1580.47 2107.95,1580.47 2264.59,1600.63 2107.95,1611.96 2264.59,1651.81 990.95,1672.13 1211.42,1672.13 1672.74,1684.3 2264.59,1703 1354,1752 90,1767.01
VLXSMPS: U13.E1
VMUX: U21.16
VSYS: C1.1 C2.1 C3.1 C7.1 C15.1 C33.1 C37.2 C38.2 C68.2 C79.2 C80.2 L4.2 L5.1 L6.2 U6.11 U6.12 U10.10 U10.16 U19.11 U19.12 U21.2 U21.7 U21.8 U21.21 U21.22 U21.32 U21.39 U21.42 U26.7 U26.8 | length 9008.6
  Top Layer w8: C80.2@455.56,660.28 455.56,710.13 C79.2@455.44,710.25 467.59,722.4 L4.2@510,722.4 568.64,722.4 570.71,724.47 U19.12@570.71,729.29 ; U19.12@570.71,740.12 U19.12@570.71,729.29 ; U19.11@588.43,740.12 588.43,725 575,725 U19.12@570.71,729.29 ; L6.2@870,754.41 870,792 885.01,807.01 926.38,807.01 C38.2@929.96,810.59 ; U6.12@930.71,772.13 930.65,772.19 930.65,787.94 930,788.59 930,810.55 C38.2@929.96,810.59 ; U6.11@948.43,772.13 948.43,795.43 954.58,801.58 954.58,805.21 C37.2@959.96,810.59 ; C37.2@954.58,807.01 v1(945,807.01) 943.47,808.54 932.01,808.54 C38.2@929.96,810.59 ; v1(2460,1142.01) 2470.75,1152.76 U21.42@2512.76,1152.76 ; v1(2460,1232.01) 2460,1224.84 2484.84,1200 U21.39@2512.76,1200 ; C2.1@2542,951 2559.02,968.02 U21.2@2559.02,1027.34 ; C2.1@2546,945 2575,916 2612,916 2637.76,941.76 U21.7@2637.76,1014.96 2637.76,1025.76 2638,1026 ; U21.32@2607,1272 2607,1308 2634,1335 2640.36,1335 2655.36,1350 v1(2680,1350) ; 2640.76,1027.76 U21.8@2653.5,1027.76 ; U21.21@2747.01,1184.25 2781.75,1184.25 ; U21.22@2747.01,1200 2766,1200 2781.75,1184.25 ; C1.1@2830,1158 2808,1158 2781.75,1184.25 ; C3.1@2832.4,1112.01 C1.1@2832.4,1159.4
  Top Layer w10: U10.16@2196.5,785.16 2196.5,740.5 2212,725 2366,725 ; U10.10@2353.98,785.16 2353.98,737.02 2366,725 ; v1(2415,725) 2366,725
  Top Layer w16: v1(2525.27,3648.53) 2525.27,3673.27 v1(2526,3674)
  Mid-Layer 4 w16: v1(2526,3674) 2525,3673 2525.27,3672.73 v1(2525.27,3648.53) 2525.27,3426.27 2477,3378 2477,3206 2527,3156 2527,2525 2864,2188 2864,1190 2833,1159 v1(2833,1110)
  Mid-Layer 4 w20: v1(2460,1142.01) 2514,1196.01 2514,1234 ; v1(2460,1232.01) 2461.99,1234 2514,1234 ; v1(2514,1346) 2514,1234
  Bottom Layer w20: v1(456,685) 468,685 689,906 858,906 1106.5,657.5 1170.5,657.5 1342.5,485.5 1342.5,421.5 1385.04,378.96 1957.86,378.96 2039,297.82 2039,216 2075,180 2486.35,180 2514,207.65 2514,747.73 ; v1(2415,725) 2491.27,725 2514,747.73 ; v1(2460,1142.01) 2508.86,1142.01 2514,1147.15 ; v1(2545,947.01) 2544.01,948 2514,948 ; v1@2680,1346 v1(2514,1346) 2514,1043 ; v1@2833,1159 v1(2833,1110) 2766,1043 2514,1043 ; 2514,747.73 2514,948 ; 2514,948 2514,1043
  other v1: 2834,1159
W\A\K\E\U\P\: U21.13
pads on no net: "Battery Connector.5" "Battery Connector.6" "Encode_HMI-Rotary Encoder1.1" "Encode_HMI-Rotary Encoder1.2" "Encode_HMI-Rotary Encoder1.3" "Encode_HMI-Rotary Encoder1.4" "Encode_HMI-Rotary Encoder1.5" "Encode_HMI-Rotary Encoder1.6" "Encode_HMI-Rotary Encoder2.1" "Encode_HMI-Rotary Encoder2.2" "Encode_HMI-Rotary Encoder2.3" "Encode_HMI-Rotary Encoder2.4" "Encode_HMI-Rotary Encoder2.5" "Encode_HMI-Rotary Encoder2.6" "U2_Audio I/V1.9" "U2_Audio I/V2.9" "U16_Audio I/V1.9" "U16_Audio I/V2.9" Audio.0 Audio.2 FPC1.25 FPC1.26 FPC1.27 FPC1.28 FPC2.7 FPC2.8 MR1.Mark MR2.Mark MR3.Mark MR4.Mark SW1.0 U3.21 U3.23 U3.24 U5.3 U8.2 U8.3 U8.10 U10.9 U10_U_SDRAM1.E3 U10_U_SDRAM1.E7 U10_U_SDRAM1.H7 U10_U_SDRAM1.K2 U10_U_SDRAM1.K3 U10_U_SDRAM2.E3 U10_U_SDRAM2.E7 U10_U_SDRAM2.H7 U10_U_SDRAM2.K2 U10_U_SDRAM2.K3 U12.4 U12.5 U12.8 U12.24 U12.25 U12.26 U12.27 U12.28 U12.29 U12.30 U12.32 U12.35 U12.37 U12.38 U12.39 U12.40 U12.45 U12.46 U12.47 U18.2 U18.3 U18.4 U18.8 U18.9 U18.12 U18.13 U18.14 U18.15 U18.17 U18.18 U18.22 U18.25 U18.26 U18.27 U18.28 U18.29 U18.30 U18.39 U18.44 U18.46 U21.14 U21.15 U21.17 U22.A1 U22.A2 U22.A7 U22.A8 U22.A9 U22.A10 U22.A11 U22.A12 U22.A13 U22.A14 U22.B1 U22.B7 U22.B8 U22.B9 U22.B10 U22.B11 U22.B12 U22.B13 U22.B14 U22.C1 U22.C3 U22.C5 U22.C7 U22.C8 U22.C9 U22.C10 U22.C11 U22.C12 U22.C13 U22.C14 U22.D1 U22.D2 U22.D3 U22.D4 U22.D12 U22.D13 U22.D14 U22.E1 U22.E2 U22.E3 U22.E5 U22.E8 U22.E9 U22.E10 U22.E12 U22.E13 U22.E14 U22.F1 U22.F2 U22.F3 U22.F10 U22.F12 U22.F13 U22.F14 U22.G1 U22.G2 U22.G3 U22.G10 U22.G12 U22.G13 U22.G14 U22.H1 U22.H2 U22.H3 U22.H5 U22.H12 U22.H13 U22.H14 U22.J1 U22.J2 U22.J3 U22.J12 U22.J13 U22.J14 U22.K1 U22.K2 U22.K3 U22.K6 U22.K7 U22.K10 U22.K12 U22.K13 U22.K14 U22.L1 U22.L2 U22.L3 U22.L12 U22.L13 U22.L14 U22.M1 U22.M2 U22.M3 U22.M7 U22.M8 U22.M9 U22.M10 U22.M11 U22.M12 U22.M13 U22.M14 U22.N1 U22.N3 U22.N6 U22.N7 U22.N8 U22.N9 U22.N10 U22.N11 U22.N12 U22.N13 U22.N14 U22.P1 U22.P2 U22.P7 U22.P8 U22.P9 U22.P10 U22.P11 U22.P12 U22.P13 U22.P14 U26.2 U26.5 U26.6 U26.12 U26.13 USBC1. USBC1.0 USBC1.A8 USBC1.B8 USBC2. USBC2.0 USBC2.A8 USBC2.B8

## Polygon pours and split planes (outlines as drawn)
Audio_RT1 on Top Layer "AUDIO_RT1_L01_P000" (solid, remove dead copper, pour order 0): 0,78.74 ccw(c78.74,78.74) 78.74,0 1415,0 2913.39,0 ccw(c2913.39,78.74) 2992.13,78.74 2992.13,3858.27 ccw(c2913.39,3858.27) 2913.39,3937.01 2440.94,3937.01 ccw(c2440.94,3858.27) 2362.2,3858.27 2362.2,2362.2 cw(c2283.46,2362.2) 2283.46,2283.46 78.74,2283.46 ccw(c78.74,2204.72) 0,2204.72
Audio_RT1 on Mid-Layer 1 "AUDIO_RT1_L02_P001" (solid, remove dead copper, pour order 1): 0,78.74 ccw(c78.74,78.74) 78.74,0 1415,0 2913.39,0 ccw(c2913.39,78.74) 2992.13,78.74 2992.13,3858.27 ccw(c2913.39,3858.27) 2913.39,3937.01 2440.94,3937.01 ccw(c2440.94,3858.27) 2362.2,3858.27 2362.2,2362.2 cw(c2283.46,2362.2) 2283.46,2283.46 78.74,2283.46 ccw(c78.74,2204.72) 0,2204.72
Audio_RT1 on Mid-Layer 2 "AUDIO_RT1_L03_P002" (solid, remove dead copper, pour order 2): 0,78.74 ccw(c78.74,78.74) 78.74,0 1415,0 2913.39,0 ccw(c2913.39,78.74) 2992.13,78.74 2992.13,3858.27 ccw(c2913.39,3858.27) 2913.39,3937.01 2440.94,3937.01 ccw(c2440.94,3858.27) 2362.2,3858.27 2362.2,2362.2 cw(c2283.46,2362.2) 2283.46,2283.46 78.74,2283.46 ccw(c78.74,2204.72) 0,2204.72
Audio_RT1 on Mid-Layer 3 "AUDIO_RT1_L04_P003" (solid, remove dead copper, pour order 3): 0,78.74 ccw(c78.74,78.74) 78.74,0 1415,0 2913.39,0 ccw(c2913.39,78.74) 2992.13,78.74 2992.13,3858.27 ccw(c2913.39,3858.27) 2913.39,3937.01 2440.94,3937.01 ccw(c2440.94,3858.27) 2362.2,3858.27 2362.2,2362.2 cw(c2283.46,2362.2) 2283.46,2283.46 78.74,2283.46 ccw(c78.74,2204.72) 0,2204.72
VLDO4_3.3V on Mid-Layer 4 "NONET_L-01_P-001" (solid, remove dead copper, pour order 4): 8.48,965 2405,965 2535,1095 2535,1550 2255,1830 1030,1830 599.6,2260.4 11.54,2260.4
Audio_RT1 on Mid-Layer 4 "AUDIO_RT1_L05_P006" (solid, remove dead copper, pour order 6): 0,78.74 ccw(c78.74,78.74) 78.74,0 1415,0 2913.39,0 ccw(c2913.39,78.74) 2992.13,78.74 2992.13,3858.27 ccw(c2913.39,3858.27) 2913.39,3937.01 2440.94,3937.01 ccw(c2440.94,3858.27) 2362.2,3858.27 2362.2,2362.2 cw(c2283.46,2362.2) 2283.46,2283.46 78.74,2283.46 ccw(c78.74,2204.72) 0,2204.72
Audio_RT1 on Bottom Layer "AUDIO_RT1_L06_P005" (solid, remove dead copper, pour order 5): 0,78.74 ccw(c78.74,78.74) 78.74,0 1415,0 2913.39,0 ccw(c2913.39,78.74) 2992.13,78.74 2992.13,3858.27 ccw(c2913.39,3858.27) 2913.39,3937.01 2440.94,3937.01 ccw(c2440.94,3858.27) 2362.2,3858.27 2362.2,2362.2 cw(c2283.46,2362.2) 2283.46,2283.46 78.74,2283.46 ccw(c78.74,2204.72) 0,2204.72

## Keep-outs
Keep-Out Layer:
  lines w10: 2632,3407 2998,3407 2998,3946 2632,3946 2632,3407

## Other copper
Top Layer:
  rectangle net NetSPK+_1: 2479.06,3782.01 2538.11,3900.12
  rectangle net NetSPK-_1: 2397.8,3782.01 2456.85,3900.12

## Silkscreen, mask and mechanical layers (free items; w line width, h text height)
Top Overlay:
  text "SDRAM2" at 2060.83,1303.03 h60 r90
  text "SDRAM1" at 1641.65,1300.2 h60 r90
Top Solder:
  text "Alpha" at 2014.93,2098.69 h150
Mechanical 1:
  lines w3.94: -1698.03,-7.99 ccw(c-1698.03,-7.99) -1698.03,-7.99 ; 0,78.74 ccw(c78.74,78.74) 78.74,0 1222.44,0 1222.44,246.12 1415,246.12 1415,0 2913.39,0 ccw(c2913.39,78.74) 2992.13,78.74 2992.13,3858.27 ccw(c2913.39,3858.27) 2913.39,3937.01 2440.94,3937.01 ccw(c2440.94,3858.27) 2362.2,3858.27 2362.2,2362.2 cw(c2283.46,2362.2) 2283.46,2283.46 78.74,2283.46 ccw(c78.74,2204.72) 0,2204.72 0,78.74

## Text inside footprints (layer, text, board x,y; h text height)
J1: Top 3D Body "PCB END" at 1300.43,-27.48 h20; Mechanical 8 "PCB Cutout" at 1241.37,118.19 h20